# Altium PCB PCB2.PcbDoc
Units mm, origin at the board's own origin, x right, y up, seen from the top; angles counter-clockwise.
Board outline 54.99 x 39.37 mm, 2 copper layers (Top Layer, Bottom Layer); 31 components, 22 nets, 106 pads, 0 vias.
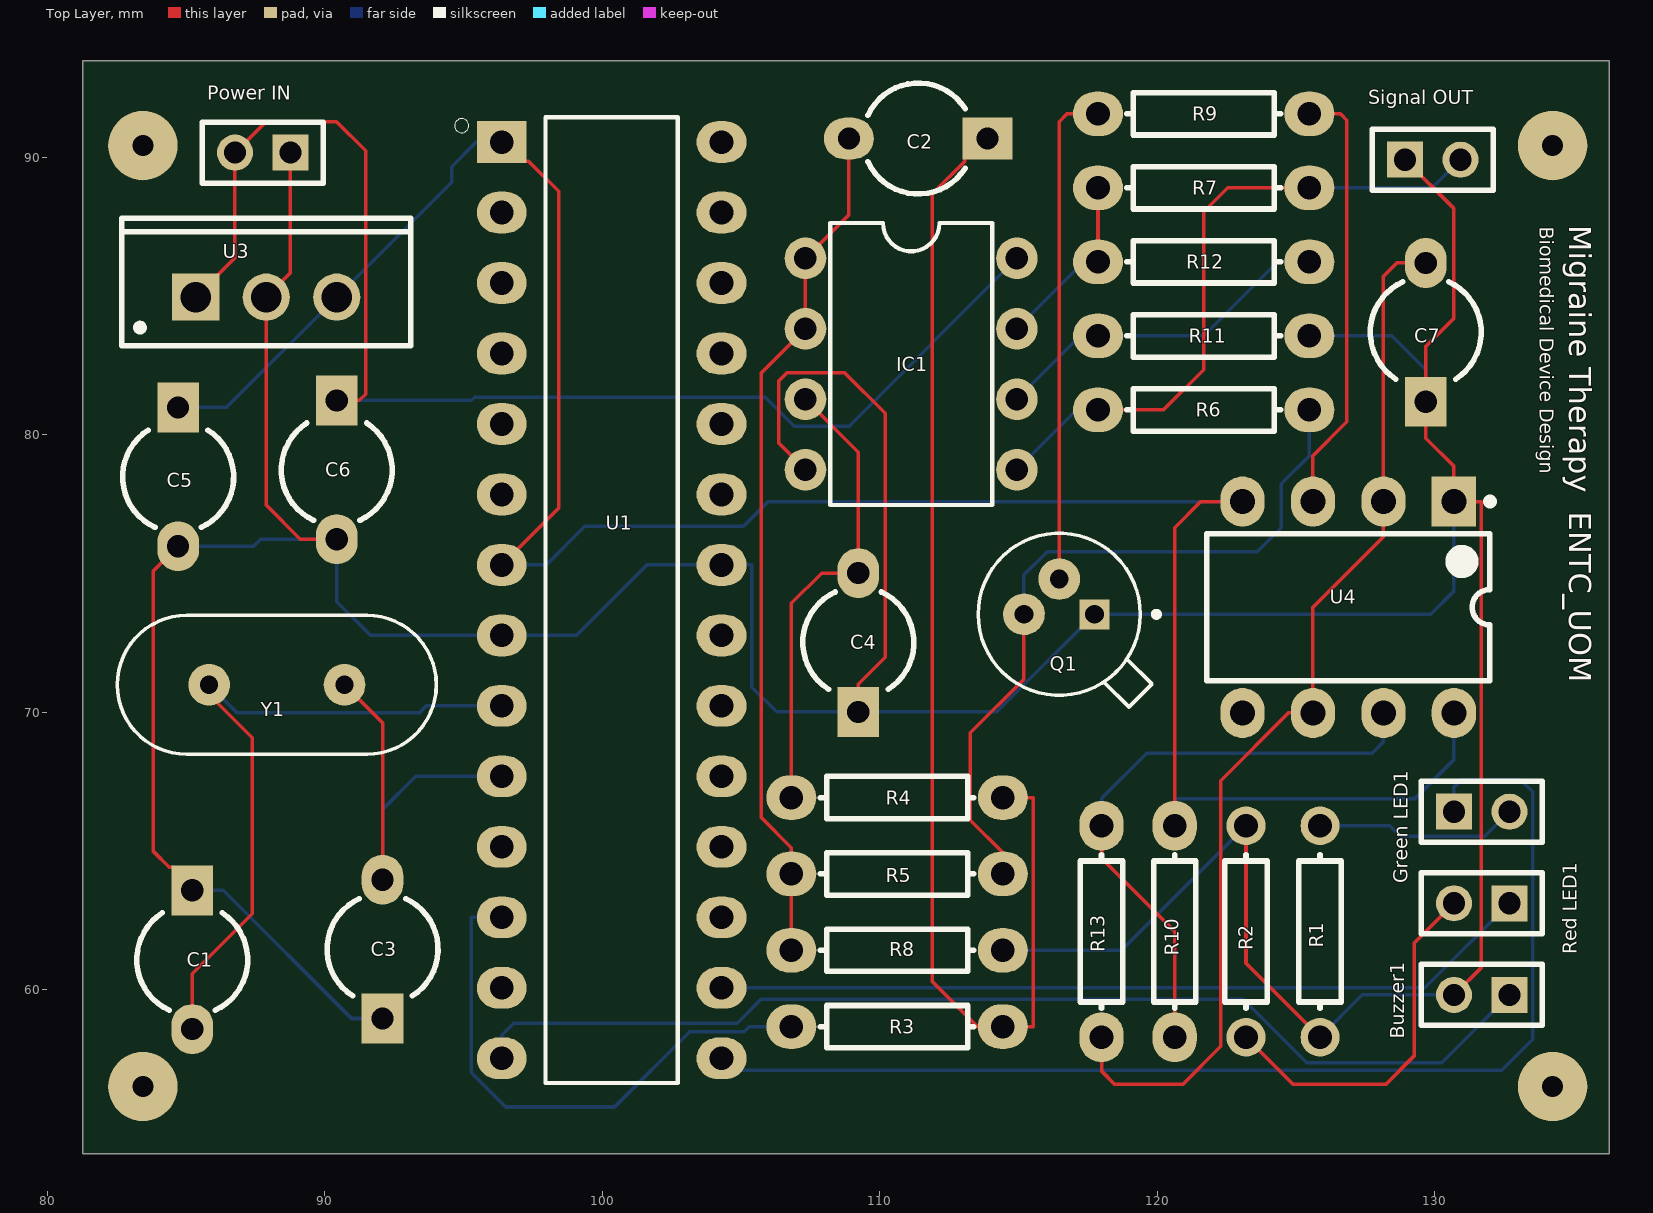
[diagram p0: Top Layer view]
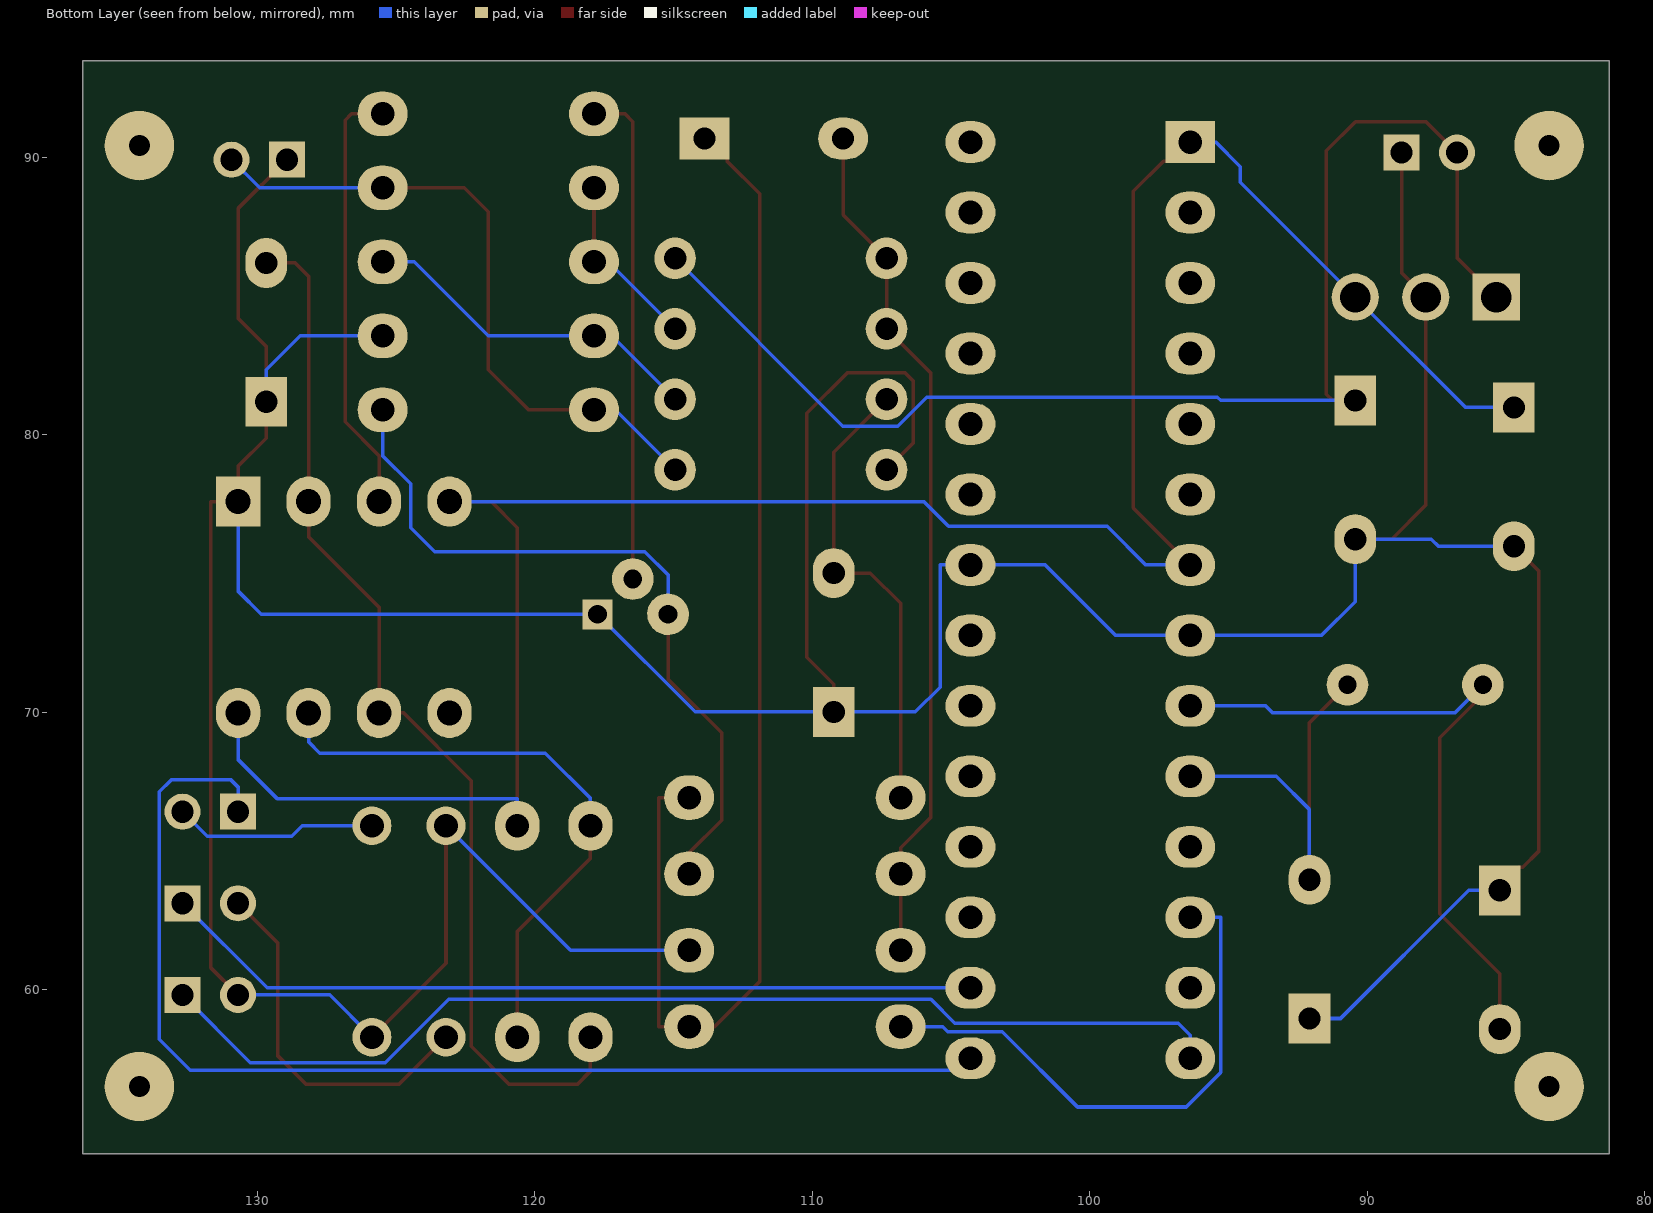
[diagram p1: Bottom Layer view, seen from below]

## Layer stack, top to bottom
Top Solder: solder mask 0.0102, Solder Resist, Dk 3.5
Top Layer: signal copper 0.0356
Dielectric 1: dielectric 0.32, FR-4, Dk 4.8
Bottom Layer: signal copper 0.0356
Bottom Solder: solder mask 0.0102, Solder Resist, Dk 3.5

## Board outline
81.28,54.102 81.28,93.472 136.271,93.472 136.271,54.102

## Design rules (kind name [scope] priority, off if disabled: settings)
BoardOutlineClearance [All] p1: gap=0.2 ignorepadtopadclearanceinfootprint=FALSE
Clearance [All] p1: gap=0.127 ignorepadtopadclearanceinfootprint=FALSE except(0.25: Arc-Hole Track-Hole SMDPad-Hole THPad-Hole Via-Hole Fill-Hole Poly-Hole Region-Hole Text-Hole)
ComponentClearance [All] p1: gap=0.127 collisioncheckmode=3 verticalgap=0.127 showdistances=TRUE
DiffPairsRouting [All] p1: maxlimit=0.254 minlimit=0.127 mostfreqgap=0.127 toplayer_minwidth=0.127 toplayer_maxwidth=25.4 toplayer_prefwidth=0.127 bottomlayer_minwidth=0.127 bottomlayer_maxwidth=25.4 bottomlayer_prefwidth=0.127 maxuncoupledlength=12.7
Height [All] p1: minheight=0 maxheight=1816.048 prefheight=12.7
HoleSize [All] p1: absolutevalues=TRUE maxlimit=6.3 minlimit=0.3 maxpercent=80.000 minpercent=20.000
HoleToHoleClearance [All] p1: gap=0.25 allowstackedmicrovias=FALSE
MinimumAnnularRing [All] p1: minimumring=0.076
MinimumSolderMaskSliver [All] p1: minsoldermaskwidth=0
PlaneClearance [All] p1: clearance=0.127
PlaneConnect PlaneConnectPowerPads [InPadClass('PowerPads')] p1: planeconnectstyle=Direct reliefexpansion=0.508 reliefentries=4 reliefconductorwidth=0.254 reliefairgap=0.254
PlaneConnect [All] p2: pad.planeconnectstyle=Relief pad.reliefexpansion=0.3 pad.reliefentries=4 pad.reliefconductorwidth=0.127 pad.reliefairgap=0.127 via.planeconnectstyle=Direct via.reliefexpansion=0.3 via.reliefentries=4 via.reliefconductorwidth=0.127 via.reliefairgap=0.127
PolygonConnect PolygonConnectPowerPads [All vs (InPadClass('PowerPads'))] p1: connectstyle=Direct reliefconductorwidth=0.254 reliefentries=4 polygonreliefangle="90 Angle" airgapwidth=0.254
PolygonConnect [All] p2: thpad.connectstyle=Relief thpad.reliefconductorwidth=0.127 thpad.reliefentries=4 thpad.polygonreliefangle="90 Angle" thpad.airgapwidth=0.127 smdpad.connectstyle=Relief smdpad.reliefconductorwidth=0.127 smdpad.reliefentries=4 smdpad.polygonreliefangle="90 Angle" smdpad.airgapwidth=0.127 via.connectstyle=Direct via.reliefconductorwidth=0.127 via.reliefentries=4 via.polygonreliefangle="90 Angle" via.airgapwidth=0.127
RoutingVias [All] p1: holewidth=0.3 width=0.6 viastyle="Through Hole" minholewidth=0.3 minwidth=0.6 maxholewidth=0.6 maxwidth=6.6
SilkToSilkClearance [All] p1: silktosilkclearance=0
SilkToSolderMaskClearance [IsPad] p1: minsilkscreentomaskgap=0.127 clearancetoexposedcopper=TRUE
SolderMaskExpansion [All] p1: expansion=0.075 istentingtop=FALSE
Width [All] p1: maxlimit=25.4 minlimit=0.127 preferedwidth=0.127 minimp=50.000000 maximp=50.000000 favimp=50.000000
20 further rules are at their usual default settings.

## Classes and differential pairs
component class Sheet1: C1 C2 C3 C4 C5 C6 C7 IC1 Q1 R4 R6 R7 R8 R10 R12 U1 Y1

## Components (designator, comment, footprint, x,y, rotation, side; value= is the part's Value field where it differs from the comment)
Buzzer1 "M22-2510205" FP-M22-2510205-MFG 131.683,59.817 r180 top
C1 "Cap2" CAPR5-4X5 85.217,61.087 r270 top value=22pF
C2 "Cap2" CAPR5-4X5 111.379,90.678 r180 top value=1uF
C3 "Cap2" CAPR5-4X5 92.075,61.468 r90 top value=22pF
C4 "Cap2" CAPR5-4X5 109.22,72.517 r90 top value=1uF
C5 "Cap2" CAPR5-4X5 84.709,78.486 r270 top value=100nF
C6 "Cap2" CAPR5-4X5 90.424,78.74 r270 top value=330nF
C7 "Cap2" CAPR5-4X5 129.667,83.693 r90 top value=10nF
"Green LED1" "M22-2510205" FP-M22-2510205-MFG 131.683,66.421 r0 top
IC1 "LM358" *DIL08 111.125,82.55 r270 top
"Power IN" "M22-2510205" FP-M22-2510205-MFG 87.757,90.17 r180 top
Q1 "2N2222" TO127P584H533-3 116.459,73.533 r180 top
R1 "Res1" AXIAL-0.3#1 125.857,62.103 r90 top value=330ohm
R2 "Res1" AXIAL-0.3#1 123.19,62.103 r270 top value=330ohm
R3 "Res1" AXIAL-0.3#2 110.617,58.674 r0 top value=33K (schematic designator R1)
R4 "Res1" AXIAL-0.3#2 110.617,66.929 r180 top value=33K (schematic designator R2)
R5 "Res1" AXIAL-0.3#2 110.617,64.177 r0 top value=1K (schematic designator R4)
R6 "Res1" AXIAL-0.3#2 121.666,80.899 r180 top value=1K (schematic designator R5)
R7 "Res1" AXIAL-0.3#2 121.666,88.9 r180 top value=1K (schematic designator R6)
R8 "Res1" AXIAL-0.3#2 110.617,61.426 r180 top value=1K (schematic designator R7)
R9 "Res1" AXIAL-0.3#2 121.666,91.567 r180 top value=100 (schematic designator R8)
R10 "Res1" AXIAL-0.3#2 120.621,62.103 r90 top value=1K (schematic designator R9)
R11 "Res1" AXIAL-0.3#2 121.666,83.566 r180 top value=1K (schematic designator R10)
R12 "Res1" AXIAL-0.3#2 121.666,86.233 r180 top value=1K (schematic designator R11)
R13 "Res1" AXIAL-0.3#2 117.983,62.103 r90 top value=750K (schematic designator R12)
"Red LED1" "M22-2510205" FP-M22-2510205-MFG 131.683,63.119 r180 top
"Signal OUT" "M22-2510205" FP-M22-2510205-MFG 129.921,89.916 r0 top
U1 "ATMEGA328P-PU" DIP794W46P254L2967H457Q28B 100.33,74.041 r0 top
U3 "L7805CV" TO220 87.884,84.963 r0 top
U4 "NE555P" P0008A 126.873,73.787 r270 top (schematic designator U3)
Y1 "ABL-16.000MHZ-T" XTAL_HC49P488W46L1150T500H350 88.265,70.993 r180 top

## Footprints (in the part's own frame and the unit in brackets; to place one, negate y for a bottom-side part, rotate by r counter-clockwise, add the part's x,y. Pads: shape width x height; smd on the part's side, far side on the other; paste and mask are expansions set on the pad)
*DIL08 [mm]
  round 1.5 hole 0.813: 1(-3.81,-3.81) 2(-1.27,-3.81) 3(1.27,-3.81) 4(3.81,-3.81) 5(3.81,3.81) 6(1.27,3.81) 7(-1.27,3.81) 8(-3.81,3.81)
  silkscreen extent -5.08,-2.92 5.08,2.92
AXIAL-0.3#1 [mm] "Axial Device, Thru-Hole; 2 Leads; 0.3 in Pin Spacing"
  round 1.4 hole 0.85: 1(-3.81,0) 2(3.81,0)
  silkscreen extent -2.77,-0.76 2.77,0.76
AXIAL-0.3#2 [mm] "Axial Device, Thru-Hole; 2 Leads; 0.3 in Pin Spacing"
  oval 1.8x1.6 hole 0.85: 1(-3.81,0) 2(3.81,0)
  silkscreen extent -2.77,-0.76 2.77,0.76
CAPR5-4X5 [mm] "Capacitor; 2 Leads"
  rect 1.8x1.5 hole 0.8: 1(-2.5,0)
  oval 1.8x1.5 hole 0.8: 2(2.5,0)
  silkscreen extent -1.69,-2 1.82,2
DIP794W46P254L2967H457Q28B [mm]
  rect 1.8x1.5 hole 0.85: 1(-3.96,16.51)
  oval 1.8x1.5 hole 0.85: 2(-3.96,13.97) 3(-3.96,11.43) 4(-3.96,8.89) 5(-3.96,6.35) 6(-3.96,3.81) 7(-3.96,1.27) 8(-3.96,-1.27) 9(-3.96,-3.81) 10(-3.96,-6.35) 11(-3.96,-8.89) 12(-3.96,-11.43) 13(-3.96,-13.97) 14(-3.96,-16.51) 15(3.96,-16.51) 16(3.96,-13.97) 17(3.96,-11.43) 18(3.96,-8.89) 19(3.96,-6.35) 20(3.96,-3.81) 21(3.96,-1.27) 22(3.96,1.27) 23(3.96,3.81) 24(3.96,6.35) 25(3.96,8.89) 26(3.96,11.43) 27(3.96,13.97) 28(3.96,16.51)
  silkscreen extent -5.65,-17.4 2.38,17.4
FP-M22-2510205-MFG [mm]
  rect 1.3x1.3 hole 0.8 paste-1000 mask+0: 1(-1,0)
  round 1.3 hole 0.8 paste-1000 mask+0: 2(1,0)
  silkscreen extent -2.17,-1.1 2.18,1.1, body extent -2.27,-1.2 2.27,1.2, height 0.25
P0008A [mm] "DIP, 8-Leads, Body 10.15x6.6mm, Pitch 2.54mm"
  rect 1.8x1.6 hole 0.9: 1(-3.81,3.81)
  oval 1.8x1.6 hole 0.9: 2(-3.81,1.27) 3(-3.81,-1.27) 4(-3.81,-3.81) 5(3.81,-3.81) 6(3.81,-1.27) 7(3.81,1.27) 8(3.81,3.81)
  silkscreen extent -3.93,-5.1 2.65,5.24, body extent -3.95,-5.07 3.95,5.07, height 5.08
TO127P584H533-3 [mm]
  rect 1.08x1.08 hole 0.68: 1(-1.27,0)
  round 1.5 hole 0.68: 2(0,-1.27) 3(1.27,0)
  silkscreen extent -3.6,-2.92 2.92,3.34
TO220 [mm] "TO, Thru-Hole, Vertical, Heatsink Mounted; 3 In-Line Leads; Pitch 2.54 mm"
  rect 1.7x1.7 hole 1.1: 1(-2.54,0)
  round 1.7 hole 1.1: 2(0,0) 3(2.54,0)
  silkscreen extent -5.2,-1.75 5.2,2.85, body extent -5.25,-1.8 5.25,2.9, height 19.7
XTAL_HC49P488W46L1150T500H350 [mm]
  round 1.5 hole 0.657: 1(-2.44,0) 2(2.44,0)
  silkscreen extent -5.75,-2.5 5.75,2.5, body extent -5.75,-3.25 5.75,5.75, height 2.5

## Part data
Buzzer1 "Green LED1" "Power IN" "Red LED1" "Signal OUT": library part CMP-15831-000005-1, "CONN HEADER VERT 2POS 2MM", Current Rating=2A, Manufacturer=Harwin, Package=0, Temperature="-40°C to +105°C", Temperature Range High=+105°C, Temperature Range Low=-40°C, Automotive=No, Category=Conn, ComponentLink2Description=Datasheet, ComponentLink2URL=https://cdn.harwin.com/pdfs/C018XX_M22_Series_Connectors.pdf, Conn Gender=Male, Conn Orientation=Vertical, Contact Material=Gold,Nickel, Device Class L1=Connectors, Device Class L2="Headers and Wire Housings", Device Class L3=unset, Digikey Description="CONN HEADER VERT 2POS 2MM", Footprint Url=https://cdn.harwin.com/pdfs/M22-251.pdf, Height=5.45mm, Lead Free=Yes, Manufacturer Part Number=M22-2510205, Mouser Description="Headers & Wire Housings 2 PIN SIL VERTICAL GOLD PIN HEADER", Number of Contacts=2, Number of Rows=1, Octopart=https://octopart.com/m22-2510205-harwin-2538221, Pitch=2mm, RoHS=TRUE
C1 C2 C3 C4 C5 C6 C7: "Capacitor", PackageDescription="Capacitor; 2 Leads", PackageReference=CAPR5-4X5, Published=23-Sep-2002, Publisher="Altium Limited"
IC1: "Op Amp Dual Low Power Amplifier Â±16V/32V 8-Pin TO-99 Tube", Package=None, Availability="In Stock", Check_prices=https://www.snapeda.com/parts/LM358/Texas+Instruments/view-part/?ref=eda, MF="Texas Instruments", MP=LM358, Price=None, Purchase-URL=https://pricing.snapeda.com/search/part/LM358/?ref=eda, SnapEDA_Link=https://www.snapeda.com/parts/LM358/Texas+Instruments/view-part/?ref=snap
Q1: "Bipolar (BJT) Transistor NPN 50V 800mA 500mW Through Hole TO-18 (TO-206AA)", Package="TO-18 Texas Instruments", Availability=Bad, BuyPart=h, MF="ON Semiconductor", MP=2N2222, Price=None, SnapEDA_Link=https://www.snapeda.com/parts/2N2222/ON%20Semiconductor/view-part/884681/?ref=snap
R1 R2 R3 R4 R5 R6 R7 R8 R9 R10 R11 R12 R13: "Resistor", LatestRevisionDate=17-Jul-2002, LatestRevisionNote="Re-released for DXP Platform.", PackageDescription="Axial Device, Thru-Hole; 2 Leads; 0.3 in Pin Spacing", PackageReference=AXIAL-0.3, Published=8-Jun-2000, Publisher="Altium Limited"
U1: "ATmega Series 20 MHz 32 KB Flash 2 KB SRAM 8-Bit Microcontroller - DIP-28", Package=None, Availability=Unavailable, MP=ATMEGA328P-PU, Price=None
U3: library part CMP-0244-00483-1, "Positive Voltage Regulator, 5V, 3-Pin TO-220", ComponentLink1Description="Manufacturer URL", ComponentLink1URL=http://www.st.com, ComponentLink2Description=Datasheet, ComponentLink2URL=http://www.st.com/internet/com/TECHNICAL_RESOURCES/TECHNICAL_LITERATURE/DATASHEET/CD00000444.pdf, ComponentLink3Description="Package Specification", ComponentLink3URL=http://www.st.com/internet/com/TECHNICAL_RESOURCES/TECHNICAL_LITERATURE/PACKAGE_INFORMATION/CD00004649.pdf, DatasheetVersion=16/11/2011, PackageDescription="TO, Thru-Hole, Vertical, Heatsink Mounted; 3 In-Line Leads; Pitch 2.54 mm", PackageReference=TO220, PackageVersion=ver3.0
U4: library part CMP-2000-04954-1, "Precision Timer, 4.5 to 16 V, 0 to 70 degC, 8-Pin DIP, Pb-Free, Tube", Manufacturer=TexasInstruments, Maximum High Level Output Current=-200mA, Maximum Low Level Output Current=200mA, Operating Supply Voltage=5, Package=8PDIP, Package Description="8-Pin Double In-line Package, Body 9.59 x 6.35 mm, Pitch 2.54 mm", Package Reference=P8, Category=Timer, Datasheet URL=http://www.ti.com/general/docs/lit/getliterature.tsp?genericPartNumber=NE555&fileType=pdf, Datasheet Version="Rev. I, 09/2014", Manufacturer URL=http://www.ti.com/, Number of Internal Timers=1, Package URL=http://www.ti.com/lit/ml/mpdi001b/mpdi001b.pdf, Packaging=Rail/Tube, Rad Hard=No, Type=Standard
Y1: "16 MHz Â±10ppm Crystal 18pF 40 Ohms HC-49/US", Package=None, Availability="In Stock", Check_prices=https://www.snapeda.com/parts/ABL-16.000MHZ/Abracon/view-part/?ref=eda, MF="Abracon Corporation", MP=ABL-16.000MHZ, Price=None, Purchase-URL=https://pricing.snapeda.com/search/part/ABL-16.000MHZ/?ref=eda, SnapEDA_Link=https://www.snapeda.com/parts/ABL-16.000MHZ/Abracon/view-part/?ref=snap

## Free pads (board coordinates)
  round 2.5 hole 0.762: 3(83.439,90.424) 4(83.439,56.515) 5(134.239,56.515) 6(134.239,90.424)

## Nets (pads, with @x,y where several pads share a name; then routed paths per layer and width w, separated by ;. In a path a pad name is that pad's centre, name@x,y a point inside that pad or via, vN(x,y) a via of type N, cw(c..) or ccw(c..) an arc to the next point about the centre after c; other vN are vias at no path point)
5V: C5.1 R10.2 U1.1 U1.7 U3.3 U4.4 U4.8 | length 87.6
  Top Layer w0.127: U1.7 98.425,77.366 98.425,88.773 97.334,89.864 97.056,89.864 U1.1 ; R10.2 120.621,76.657 121.561,77.597 U4.4
  Bottom Layer w0.127: C5.1 86.447,80.986 U3.3 94.564,89.103 94.564,89.662 95.453,90.551 U1.1 ; U1.7 97.968,75.311 99.365,76.708 105.08,76.708 105.969,77.597 U4.4 ; R10.2 120.621,66.878 129.261,66.878 130.683,68.301 U4.8
Buz: Buzzer1.1 U1.14 | length 39.6
  Bottom Layer w0.127: U1.14 96.37,58.369 96.802,58.801 104.851,58.801 105.715,59.665 123.088,59.665 125.374,57.379 130.245,57.379 Buzzer1.1
GND: "Power IN.1" "Signal OUT.1" Buzzer1.2 C1.1 C3.1 C4.1 C5.2 C6.2 C7.1 IC1.4 Q1.1 R1.1 R2.1 R8.1 R11.1 U1.8 U1.22 U3.2 U4.1 | length 181.1
  Top Layer w0.127: C5.2 83.82,75.097 83.82,64.984 84.384,64.42 84.53,64.42 85.217,63.733 C1.1 ; 88.757,90.17 88.757,85.836 U3.2 87.884,77.47 89.114,76.24 C6.2 ; IC1.4 106.35,79.705 106.35,81.94 106.655,82.245 108.712,82.245 110.185,80.772 110.185,71.984 109.22,71.018 C4.1 ; R2.1 123.19,60.96 R1.1 ; 128.921,89.916 130.683,88.154 130.683,84.201 129.667,83.185 C7.1 129.667,79.883 130.683,78.867 U4.1 131.674,77.597 131.674,60.808 Buzzer1.2
  Bottom Layer w0.127: C5.2 87.427,75.986 87.681,76.24 C6.2 90.424,73.99 91.643,72.771 U1.8 99.06,72.771 101.6,75.311 U1.22 105.385,75.311 105.385,70.906 106.274,70.017 C4.1 114.213,70.017 Q1.1 129.845,73.533 130.683,74.371 U4.1 ; C1.1 86.335,63.587 90.954,58.968 C3.1 ; R8.1 118.703,61.426 R2.1 ; R11.1 128.448,83.566 129.667,82.347 C7.1 ; R1.1 127.381,59.817 Buzzer1.2
GREEN: "Green LED1.1" U1.15 | length 43.1
  Bottom Layer w0.127: U1.15 104.29,57.099 132.41,57.099 133.528,58.217 133.528,67.132 133.096,67.564 130.937,67.564 130.683,67.31 130.683,66.421
NetC1_2: C1.2 U1.9 Y1.2 | length 25
  Top Layer w0.127: C1.2 85.217,60.579 87.376,62.738 87.376,69.089 85.825,70.64 Y1.2
  Bottom Layer w0.127: Y1.2 86.841,69.977 93.396,69.977 93.65,70.231 U1.9
NetC2_1: C2.1 R3.2 R4.1 | length 44.9
  Top Layer w0.127: C2.1 113.733,90.678 113.046,89.991 113.046,89.845 111.887,88.686 111.887,60.3 113.513,58.674 R3.2 115.519,58.674 115.519,66.929 R4.1
NetC2_2: C2.2 IC1.1 IC1.2 R5.1 R8.2 | length 31
  Top Layer w0.127: R8.2 R5.1 106.807,65.126 105.715,66.218 105.715,82.22 IC1.2 IC1.1 108.879,87.924 C2.2
NetC3_2: C3.2 U1.10 Y1.1 | length 14.9
  Top Layer w0.127: Y1.1 92.075,69.623 C3.2
  Bottom Layer w0.127: C3.2 92.075,66.497 93.269,67.691 U1.10
NetC4_2: C4.2 IC1.3 R4.2 | length 16.9
  Top Layer w0.127: R4.2 106.807,73.925 107.899,75.017 C4.2 109.22,79.375 IC1.3
NetC7_2: C7.2 R13.1 U4.2 U4.6 | length 38.7
  Top Layer w0.127: R13.1 117.983,57.074 118.466,56.591 120.904,56.591 122.276,57.963 122.276,67.539 124.714,69.977 U4.6 125.603,73.787 128.143,76.327 U4.2 128.143,85.71 128.626,86.193 C7.2
"NetGreen LED1_2": "Green LED1.2" R1.2 | length 7.4
  Bottom Layer w0.127: R1.2 128.372,65.913 128.753,65.532 131.794,65.532 132.683,66.421
NetIC1_5: "Signal OUT.2" IC1.5 R6.2 R7.1 | length 23.9
  Top Layer w0.127: R6.2 120.218,80.899 121.666,82.347 121.666,88.036 122.53,88.9 R7.1
  Bottom Layer w0.127: IC1.5 117.094,80.899 R6.2 ; R7.1 129.905,88.9 130.921,89.916
NetIC1_6: IC1.6 R11.2 R12.1 | length 12.6
  Bottom Layer w0.127: IC1.6 117.221,83.566 R11.2 121.666,83.566 124.333,86.233 R12.1
NetIC1_7: IC1.7 R7.2 R12.2 | length 6.6
  Top Layer w0.127: R12.2 R7.2
  Bottom Layer w0.127: IC1.7 117.348,86.233 R12.2
NetQ1_2: Q1.2 R9.2 | length 18
  Top Layer w0.127: Q1.2 116.459,91.288 116.738,91.567 R9.2
NetQ1_3: Q1.3 R5.2 R6.1 | length 26.7
  Top Layer w0.127: R5.2 114.427,64.948 113.259,66.116 113.259,69.266 115.189,71.196 Q1.3
  Bottom Layer w0.127: Q1.3 115.189,74.955 116.027,75.794 123.596,75.794 124.46,76.657 124.46,78.232 125.476,79.248 R6.1
NetR2_2: "Red LED1.2" R2.2 | length 13.3
  Top Layer w0.127: R2.2 124.892,56.591 128.219,56.591 129.261,57.633 129.261,61.697 130.683,63.119
NetR3_1: R3.1 U1.12 | length 19.9
  Bottom Layer w0.127: U1.12 95.275,62.611 95.275,57.023 96.52,55.778 100.432,55.778 103.149,58.496 105.105,58.496 105.283,58.674 R3.1
NetR9_1: R9.1 U4.3 | length 15.7
  Top Layer w0.127: R9.1 126.594,91.567 126.822,91.338 126.822,80.467 125.603,79.248 U4.3
NetR10_1: R10.1 R13.2 U4.7 | length 21.7
  Top Layer w0.127: R13.2 117.983,64.741 120.621,62.103 R10.1
  Bottom Layer w0.127: R13.2 117.983,66.904 119.609,68.529 127.737,68.529 128.143,68.936 U4.7
RED: "Red LED1.1" U1.16 | length 29.7
  Bottom Layer w0.127: U1.16 129.635,60.071 132.683,63.119
VCC: "Power IN.2" C6.1 IC1.8 U3.1 | length 48.8
  Top Layer w0.127: U3.1 86.757,86.376 86.757,90.17 87.875,91.288 90.415,91.288 91.465,90.237 91.465,81.469 91.237,81.24 C6.1
  Bottom Layer w0.127: C6.1 95.275,81.24 95.392,81.356 105.867,81.356 106.909,80.315 108.89,80.315 IC1.8
pads on no net: U1.2 U1.3 U1.4 U1.5 U1.6 U1.11 U1.13 U1.17 U1.18 U1.19 U1.20 U1.21 U1.23 U1.24 U1.25 U1.26 U1.27 U1.28 U4.5

## Silkscreen, mask and mechanical layers (free items; w line width, h text height)
Top Overlay:
  text "Migraine Therapy  ENTC_UOM" at 134.833,87.557 h0.8 r270
  text "Biomedical Device Design" at 133.784,87.49 h0.5 r270
Mechanical 1:
  lines w0.254: 81.28,54.229 136.271,54.229 136.271,93.472 81.534,93.472 81.28,93.472 81.28,54.229